# EAGLE board untitled (EAGLE 6.3)
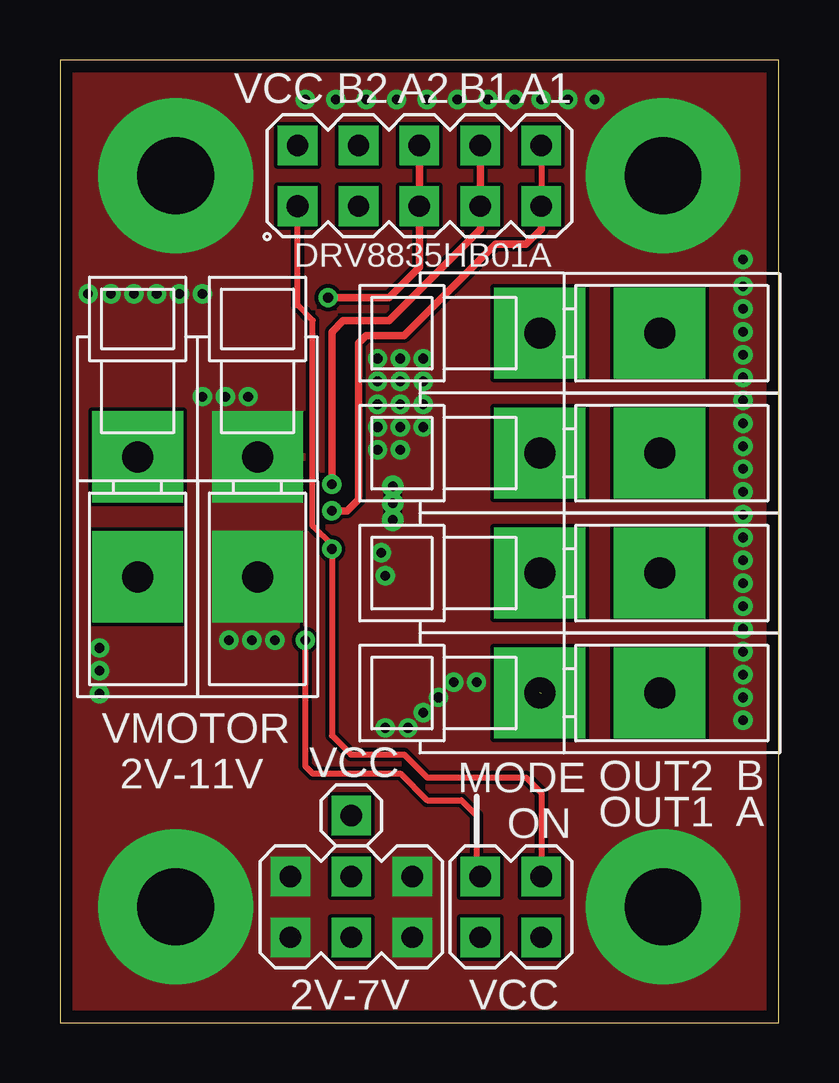
[diagram p0: board, top side]
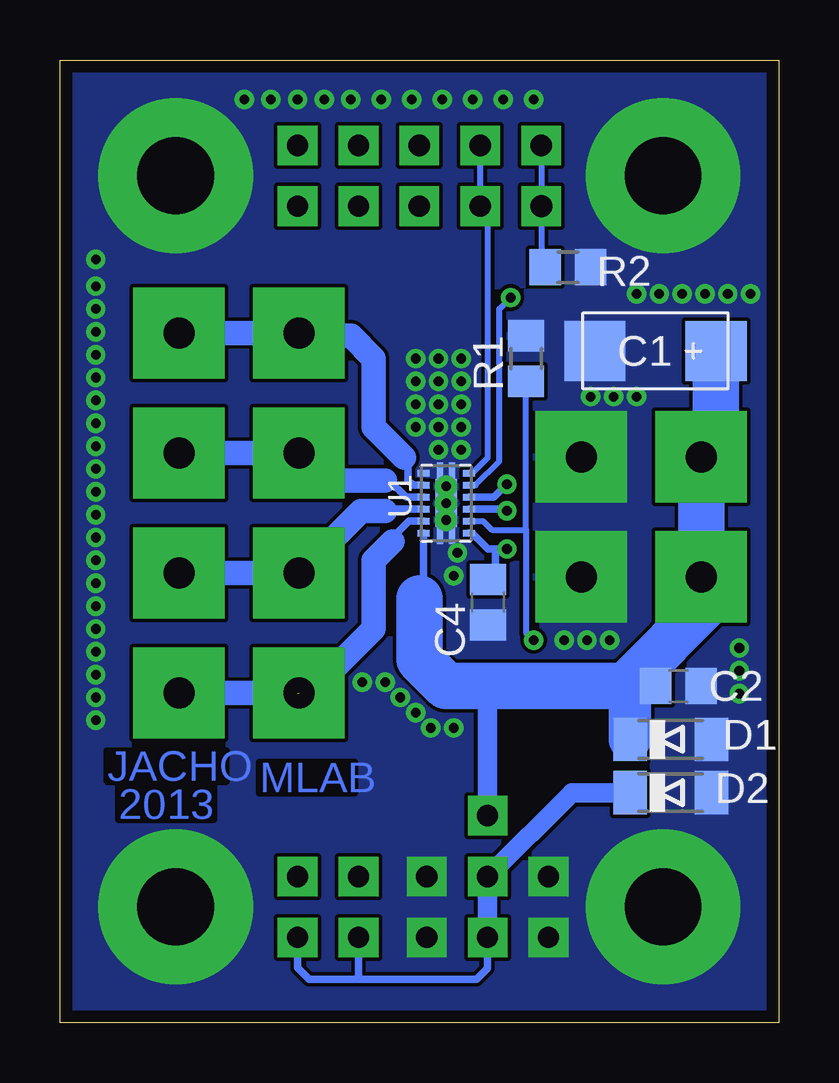
[diagram p1: board, bottom side, seen from below]

Size 29.97 x 40.13 mm. Coordinates in mm from the lower left corner, seen from the top.
Outline: 0,0 29.97,0 29.97,40.13 0,40.13 0,0
Copper layers (1*16): Top 0.035mm / dielectric 1.5mm / Bottom 0.035mm
Design rules "default": minimum track width 8mil, minimum drill 16mil, track to track 6mil, track to pad 6mil, pad to pad 6mil, via to via 6mil, smd to smd 6mil, copper to edge 20mil, drill to drill 8mil, minimum pad ring 10mil, minimum via ring 8mil, stop-mask expansion 4mil, vias tented up to drill 25mil, thermal gap 0mil

## Footprints (pad centres in the part's own frame; a part is rotated, then mirrored left to right if it is on the bottom)
C = smd 2.55 x 2.5: + 2.525,0; - -2.525,0
C0805 = smd 1.3 x 1.5: 1 -0.95,0; 2 0.95,0
MINIMELF = smd 1.4 x 1.8: A 1.7,0; C -1.7,0
0805 = smd 1.3 x 1.5: 1 -0.95,0; 2 0.95,0
WAGO256 = drill 1.3 pad 3.81 square: 1 2.54,0; A1 -2.46,0
MA05-2 = drill 0.914 pad 1.651 square: 1 -5.08,-1.27 | drill 0.889 pad 1.651 square: 2 -5.08,1.27; 3 -2.54,-1.27; 4 -2.54,1.27; 5 0,-1.27; 6 0,1.27; 7 2.54,-1.27; 8 2.54,1.27; 9 5.08,-1.27; 10 5.08,1.27
MA02-2 = drill 0.889 pad 1.651 square: 1 -1.27,-1.27; 2 -1.27,1.27; 3 1.27,-1.27; 4 1.27,1.27
MA03-2 = drill 0.889 pad 1.651 square: 1 -2.54,-1.27; 2 -2.54,1.27; 3 0,-1.27; 4 0,1.27; 5 2.54,-1.27; 6 2.54,1.27
MA01-1 = drill 0.889 pad 1.651 square: 1 0,0
WSON = smd 0.7 x 0.25: P1 -1.35,0.25; P2 -1.35,-0.25; P7 1.35,0.25; P8 1.35,-0.25 | smd 2 x 0.9: P3 0,0 | drill 0.4 pad 0.5: P4 -0.7,0; P5 0,0; P6 0.7,0 | smd 0.28 x 0.5: P$1 -1.25,0.95; P$2 -0.75,0.95; P$3 -0.25,0.95; P$4 0.25,0.95; P$5 0.75,0.95; P$6 1.25,0.95; P$7 1.25,-0.95; P$8 0.75,-0.95; P$9 0.25,-0.95; P$10 -0.25,-0.95; P$11 -0.75,-0.95; P$12 -1.25,-0.95
SROUB3M = drill 3.2 pad 6.452: P$1 0,0

## Placement (x,y rotation side)
C1  [C]  5.14,28 0 bottom
C2  [C0805]  4.19,14.03 0 bottom
C4  100nF  [C0805]  12.13,17.53 270 bottom
D1  [MINIMELF]  4.51,11.81 0 bottom
D2  [MINIMELF]  4.51,9.59 0 bottom
R1  22k  [0805]  10.54,27.69 270 bottom
R2  22k  [0805]  8.79,31.5 180 bottom
SV1  [WAGO256]  3.24,21.05 90 top
SV2  [WAGO256]  8.24,21.05 90 top
SV3  [WAGO256]  22.55,13.75 180 top
SV4  [WAGO256]  22.55,18.75 180 top
SV5  [MA05-2]  14.99,35.31 0 top
SV6  [MA02-2]  18.8,4.83 180 top
SV7  [WAGO256]  22.55,23.75 180 top
SV8  [WAGO256]  22.55,28.75 180 top
SV9  [MA03-2]  12.15,4.83 0 top
SV10  [MA01-1]  12.15,8.64 0 top
U1  [WSON]  13.87,21.65 90 bottom
X1  SROUB3M  [SROUB3M]  4.83,4.83 0 top
X2  SROUB3M  [SROUB3M]  25.15,4.83 0 top
X3  SROUB3M  [SROUB3M]  25.15,35.31 0 top
X4  SROUB3M  [SROUB3M]  4.83,35.31 0 top

## Library data of the parts
C1 C2 C4 = moje_C
D1 D2 = moje_diody
R1 R2 = moje_R
SV1-SV4 SV7 SV8 = moje_konektory
SV5 SV9 = moje_hrebinky; OC_FARNELL: unknown; OC_NEWARK: unknown
SV6 SV10 = moje_hrebinky
U1 = moje_io
X1-X4 = moje

## Nets
+VCC: D2.C SV6.2 SV6.4 SV9.3 SV9.4
GND: C1.- C2.2 C4.2 D1.A D2.A R1.1 R2.1 SV2.1 SV2.A1 SV9.1 SV9.2 SV9.5 SV9.6 U1.P1 U1.P2 U1.P3 U1.P4 U1.P5 U1.P6 U1.P7 U1.P8 U1.P$6 X1.P$1 X2.P$1 X3.P$1 X4.P$1
N$2: SV5.5 SV5.6 U1.P$8
N$8: SV5.3 SV5.4 U1.P$7
N$9: R1.2 SV6.3 U1.P$11
N$11: SV5.7 SV5.8 U1.P$9
N$13: SV5.9 SV5.10 U1.P$10
N$14: C4.1 R2.2 SV5.1 SV5.2 SV6.1 U1.P$12
N$16: SV8.1 SV8.A1 U1.P$5
N$17: SV7.1 SV7.A1 U1.P$4
N$18: SV4.1 SV4.A1 U1.P$3
N$19: SV3.1 SV3.A1 U1.P$2
VN: C1.+ C2.1 D1.C SV1.1 SV1.A1 SV10.1 U1.P$1

## Tracks (layer width: path | path; a pad name or v marks a point on that pad's centre or on a via)
+VCC
  Bottom 0.254: 17.53,1.97 17.53,1.81
  Bottom 0.305: SV9.3 12.15,2.27 12.61,1.81 17.53,1.81 19.11,1.81 19.59,1.81 20.07,2.29 SV6.2 | SV6.4 17.53,1.97
  Bottom 0.813: SV9.3 SV9.4 12.13,6.1 8.64,9.59 D2.C
GND  (via drill 0.4)
  other vias: 10.22,38.48 11.49,38.48 12.76,38.48 14.03,38.48 15.3,38.48 16.57,38.48 17.84,38.48 5.94,26.1 6.89,26.1 7.84,26.1 7.05,15.94 8,15.94 8.95,15.94 13.24,23.88 14.19,23.88 14.19,24.83 13.24,24.83 13.24,25.78 14.19,25.78 15.14,25.78 15.14,24.83 13.24,26.73 14.19,26.73 15.14,26.73 13.24,27.69 14.19,27.69 15.14,27.69 13.4,19.59 13.56,18.64 28.48,12.6 28.48,13.56 28.48,14.51 28.48,15.46 28.48,16.41 28.48,17.37 28.48,18.32 28.48,19.27 28.48,20.22 28.48,21.18 28.48,22.13 28.48,23.08 28.48,24.03 28.48,24.99 28.48,25.94 28.48,26.89 28.48,27.84 28.48,28.8 28.48,29.75 28.48,30.7 28.48,31.81 18.95,38.48 20.07,38.48 21.18,38.48 22.29,38.48 5.94,30.38 4.98,30.38 4.03,30.38 3.08,30.38 2.13,30.38 1.17,30.38 1.65,15.62 1.65,14.67 1.65,13.72 13.56,12.29 14.51,12.29 15.14,12.92 15.78,13.56 16.41,14.19 17.37,14.19
  pour Bottom: 0.06,40.07 -0.25,40.07 -0.25,-0.25 40.39,-0.25 40.39,40.39 0.06,40.39
  pour Top: -0.57,40.7 40.7,40.7 40.7,-0.25 -0.89,-0.25 -0.89,40.7
N$2  (via drill 0.4)
  Top 0.305: v11.18,30.23 13.72,30.23 14.99,31.5 SV5.5 SV5.6
  Bottom 0.254: v11.18,30.23 11.65,29.75 11.65,23.4 12.65,22.4 U1.P$8
N$8
  Bottom 0.254: SV5.4 SV5.3 12.13,33.72 12.13,23.56 12.78,22.9 U1.P$7
N$9  (via drill 0.4)
  Top 0.254: v10.22,15.94 10.22,10.7 10.54,10.38 14.19,10.38 15.3,9.27 16.73,9.27 17.37,8.64 17.37,6.26 SV6.3
  Bottom 0.254: 10.54,26.58 10.7,26.73 | U1.P$11 12.33,20.9 11.97,20.54 10.54,20.54 | 10.54,20.54 10.54,26.58 | 10.54,26.58 R1.2 | 10.54,20.54 10.54,16.26 v10.22,15.94
N$11  (via drill 0.4)
  Top 0.305: v11.34,22.45 11.34,28.8 11.81,29.27 13.72,29.27 17.53,33.08 SV5.7 SV5.8
  Bottom 0.305: U1.P$9 11.88,21.9 v11.34,22.45
N$13  (via drill 0.4)
  Top 0.254: SV5.10 SV5.9
  Top 0.305: v11.34,21.34 11.49,21.34 11.65,21.34 11.97,21.34 12.45,21.81 12.45,28.32 12.76,28.64 14.35,28.64 18.16,32.45 19.43,32.45 20.07,33.08 SV5.9
  Bottom 0.305: U1.P$10 11.56,21.4 v11.34,21.34
N$14  (via drill 0.4)
  Top 0.254: SV5.1 9.91,29.91 10.54,29.27 10.54,20.7 11.34,19.91 v11.34,19.75 11.34,11.97 12.13,11.18 14.35,11.18 15.3,10.22 19.43,10.22 20.07,9.59 SV6.1
  Bottom 0.254: SV5.2 SV5.1 | SV5.1 9.91,31.5 R2.2 | SV5.1 | C4.1
  Bottom 0.305: 12.45,18.8 C4.1 11.81,18.8 11.81,19.75 | v11.34,19.75 11.81,19.75 | 11.81,19.75 12.13,19.75 12.77,20.39 U1.P$12
N$16
  Bottom 0.305: U1.P$5 15.26,22.4 15.46,22.61 15.46,23.4 15.62,23.56
  Bottom 1.016: SV8.A1 SV8.1 19.9,28.64 17.84,28.64 16.89,27.69 16.89,24.83 15.62,23.56
N$17
  Bottom 0.305: U1.P$4 15.55,21.9 16.26,22.61 16.41,22.61
  Bottom 1.016: 16.41,22.61 18.87,22.61 SV7.1 SV7.A1
N$18
  Bottom 0.305: U1.P$3 16.35,21.4 16.41,21.34
  Bottom 1.016: 16.41,21.34 17.42,21.34 SV4.1 SV4.A1
N$19  (1 unrouted)
  Bottom 0.305: U1.P$2 15.42,20.9 15.94,20.38 15.94,20.07
  Bottom 0.406: 16.1,20.07 15.94,20.07
  Bottom 1.016: SV3.1 SV3.A1 | 20.07,13.72 19.59,13.72 16.89,16.41 16.89,19.27 16.1,20.07
VN
  Bottom 0.305: C2.1 5.78,14.03 6.1,14.35 | U1.P$1 14.83,18.32
  Bottom 0.61: 14.83,18.32 14.83,17.85 14.99,17.68
  Bottom 0.813: SV10.1 12.15,14.02 12.13,14.03
  Bottom 1.778: D1.C 6.21,14.24 6.1,14.35
  Bottom 1.93: 14.99,17.68 14.99,15.14 13.88,14.03 12.13,14.03 6.41,14.03 6.1,14.35 3.08,17.37 3.24,17.53 SV1.A1 SV1.1 2.62,24.21 C1.+

## Text on the board
Bottom: MLAB | JACHO | 2013
tPlace: VCC | B2 | A2 | B1 | A1 | DRV8835HB01A | VMOTOR | 2V-11V | VCC | MODE | OUT2 | B | ON | OUT1 | A | 2V-7V | VCC